# EAGLE board V0p2_Main_PCB2 (EAGLE 7.1.0)
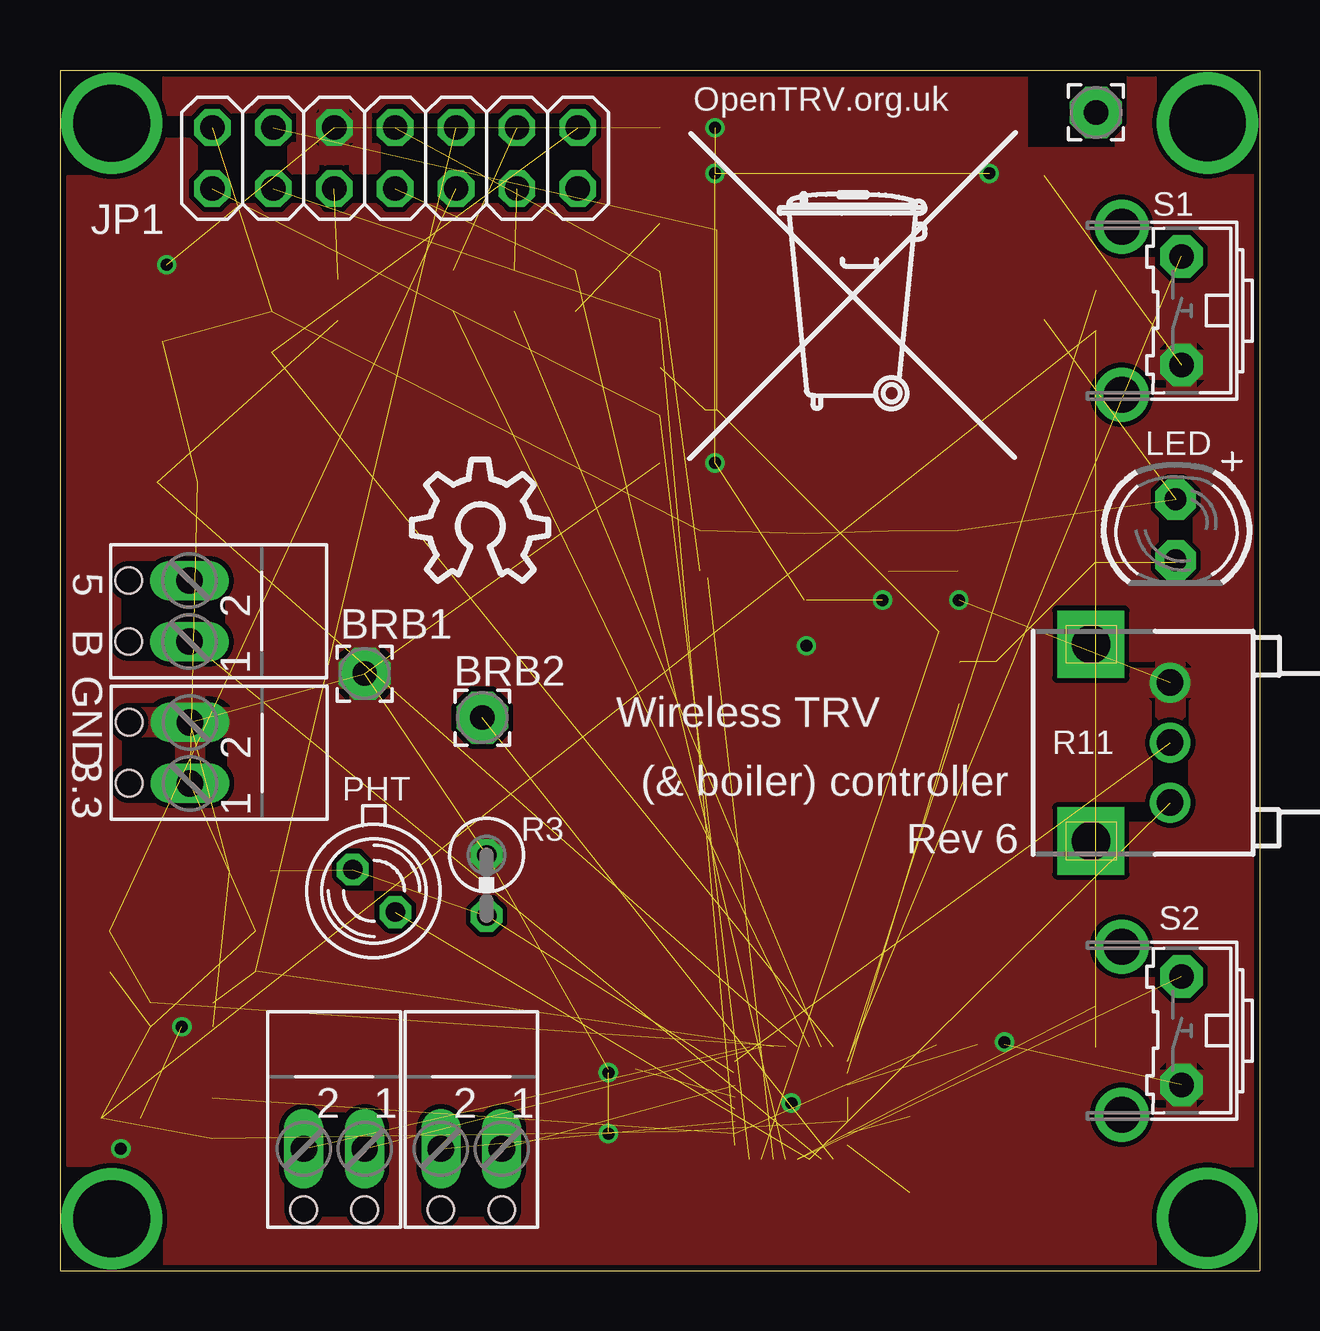
[diagram p0: board, top side]
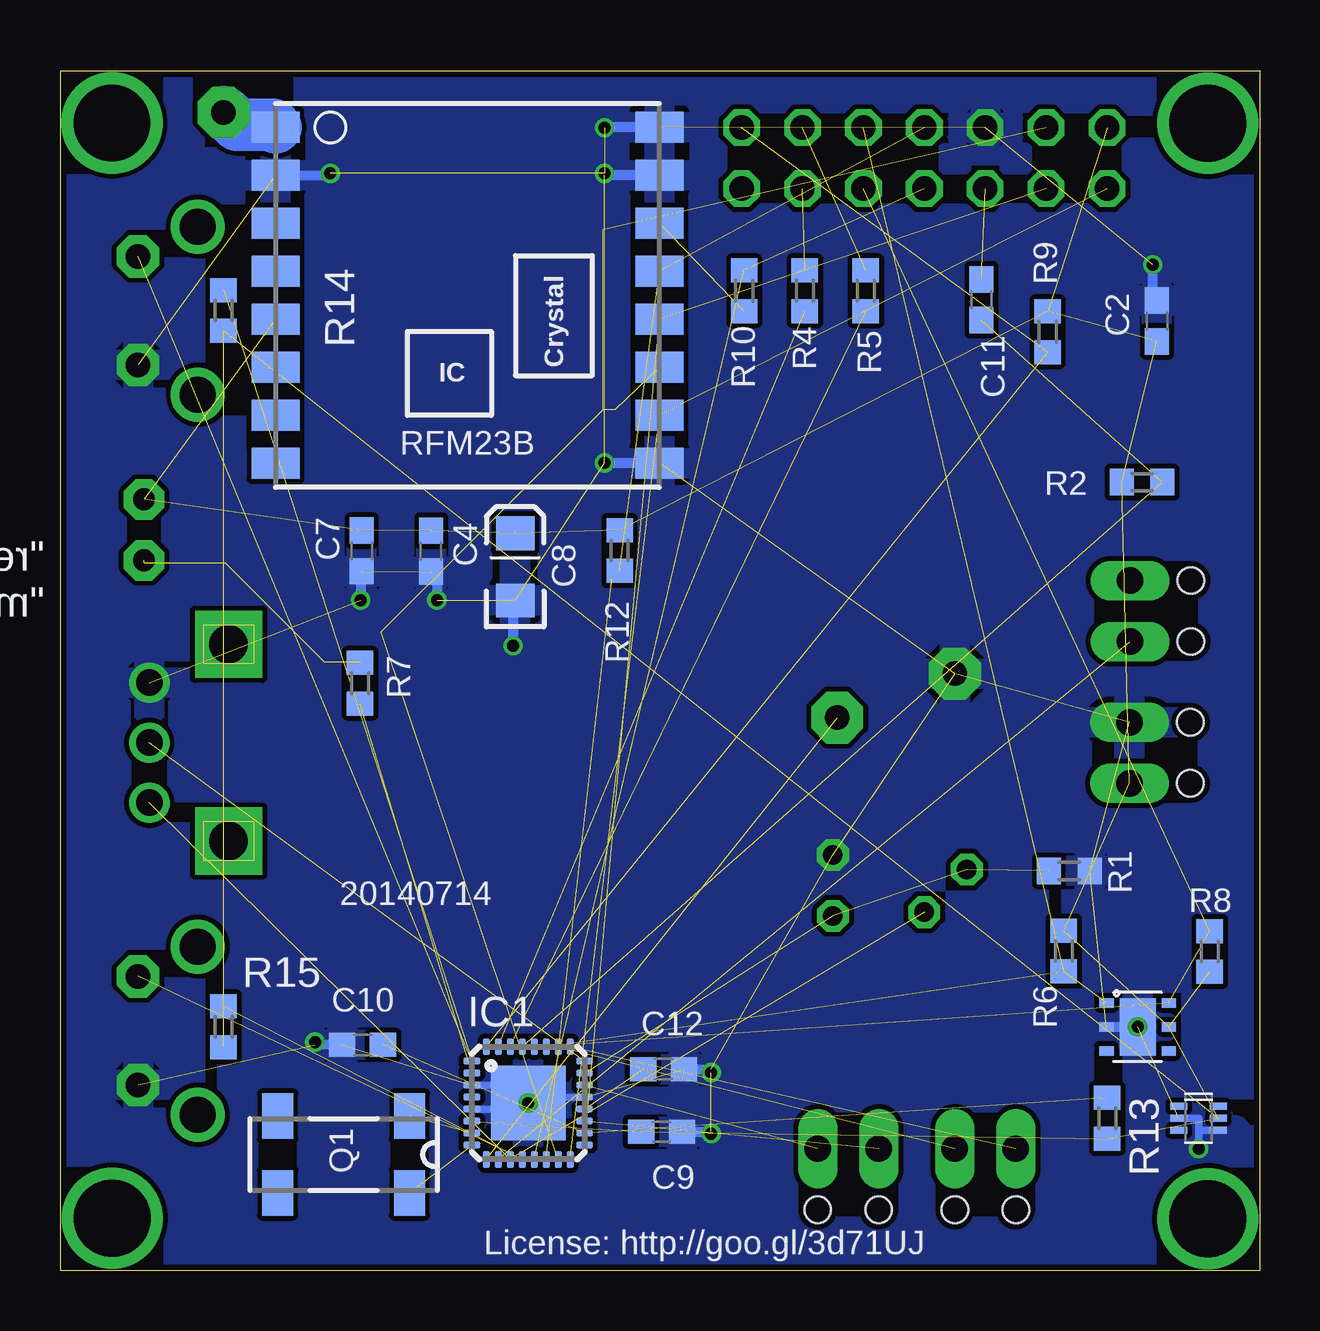
[diagram p1: board, bottom side, seen from below]

Size 50 x 50 mm. Coordinates in mm from the lower left corner, seen from the top.
Outline: 0,0 50,0 50,50 0,50 0,0
Copper layers (1*16): Top 0.035mm / dielectric 1.5mm / Bottom 0.035mm
Design rules "PMServicesStd *": minimum track width 8mil, minimum drill 0.5mm, track to track 8mil, track to pad 8mil, pad to pad 8mil, via to via 8mil, smd to smd 0mil, copper to edge 10mil, drill to drill 10mil, minimum pad ring 10mil, minimum via ring 6mil, stop-mask expansion 2mil, vias tented up to drill 100mil, thermal gap 10mil
Net classes: 0 default: width 0.203 mm; 1 supply: width 0.5 mm; 2 ant: width 2.184 mm

## Footprints (pad centres in the part's own frame; a part is rotated, then mirrored left to right if it is on the bottom)
2,15/1,0 = drill 1.016 pad 2.159 octagon: 1 0,0
C0603 = smd 1.1 x 1: 1 -0.85,0; 2 0.85,0
EIA3216 = smd 1.4 x 1.6: A 1.4,0; C -1.4,0
MLF32 = smd 0.7 x 0.3: 1 -2.35,1.75; 2 -2.35,1.25; 3 -2.35,0.75; 4 -2.35,0.25; 5 -2.35,-0.25; 6 -2.35,-0.75; 7 -2.35,-1.25; 8 -2.35,-1.75; 17 2.35,-1.75; 18 2.35,-1.25; 19 2.35,-0.75; 20 2.35,-0.25; 21 2.35,0.25; 22 2.35,0.75; 23 2.35,1.25; 24 2.35,1.75 | smd 0.3 x 0.7: 9 -1.75,-2.35; 10 -1.25,-2.35; 11 -0.75,-2.35; 12 -0.25,-2.35; 13 0.25,-2.35; 14 0.75,-2.35; 15 1.25,-2.35; 16 1.75,-2.35; 25 1.75,2.35; 26 1.25,2.35; 27 0.75,2.35; 28 0.25,2.35; 29 -0.25,2.35; 30 -0.75,2.35; 31 -1.25,2.35; 32 -1.75,2.35 | smd 3.1 x 3.1: P$1 0,0
2X07 = drill 1.016 octagon: 1 -7.62,-1.27; 2 -7.62,1.27; 3 -5.08,-1.27; 4 -5.08,1.27; 5 -2.54,-1.27; 6 -2.54,1.27; 7 0,-1.27; 8 0,1.27; 9 2.54,-1.27; 10 2.54,1.27; 11 5.08,-1.27; 12 5.08,1.27; 13 7.62,-1.27; 14 7.62,1.27
LED3MM = drill 0.914 pad 1.676 octagon: A -1.27,0; K 1.27,0
BPX65 = drill 0.813 octagon: A -0.889,-0.889; K 0.889,0.889
MC-306 = smd 1.3 x 1.9: 1 -2.75,-1.6; 2 2.75,-1.6; 3 2.75,1.6; 4 -2.75,1.6
R0603 = smd 1 x 1.1: 1 -0.85,0; 2 0.85,0
0309V = drill 0.813 octagon: 1 -1.27,0; 2 1.27,0
EVUE = drill 1.1 pad 1.676: 1 0,-2.5; 2 0,0; 3 0,2.5 | drill 1.6 pad 2.8 square: M1 -3.3,4.1; M2 -3.3,-4.1
RFM23-XXX-S1 = smd 2 x 1.3: 1 -8,7; 2 -8,5; 3 -8,3; 4 -8,1; 5 -8,-1; 6 -8,-3; 7 -8,-5; 8 -8,-7; 9 8,-7; 10 8,-5; 11 8,-3; 12 8,-1; 13 8,1; 14 8,3; 15 8,5; 16 8,7
B3F-31XX = drill 1.016 pad 1.778 octagon: 1 -2.261,-1.245; 2 2.261,-1.245 | drill 1.499 pad 2.032: 3 -3.505,1.245; 4 3.505,1.245
TMP112 = smd 0.285 x 0.7: 1 -0.5,-0.825; 2 0,-0.825; 3 0.5,-0.825; 4 0.5,0.825; 5 0,0.825; 6 -0.5,0.825
SHT21 = smd 0.4 x 0.6: 1 -1,-1.3; 2 0,-1.3; 3 1,-1.3; 4 1,1.3; 5 0,1.3; 6 -1,1.3 | smd 2.4 x 1.5: P$1 0,0
SCREWTERMINAL = drill 1.1 long: 1 -1.27,-1.27; 2 1.27,-1.27 | hole 1.1: -1.27,1.27; 1.27,1.27

## Placement (x,y rotation side)
ANT1  ANT (86 mm)  [2,15/1,0]  43.18,48.26 0 top
BRB1  BRB1  [2,15/1,0]  12.7,24.87 0 top
BRB2  BRB2  [2,15/1,0]  17.6,23.04 180 top
C2  10uF 10V  [C0603]  4.27,39.57 270 bottom
C4  100pF  [C0603]  34.53,29.98 90 bottom
C7  100nF  [C0603]  37.42,29.99 270 bottom
C8  100uF  [EIA3216]  31.03,29.33 90 bottom
C9  100nF  [C0603]  24.92,5.78 0 bottom
C10  100nF  [C0603]  37.39,9.41 180 bottom
C11  100nF  [C0603]  11.59,40.45 90 bottom
C12  100nF  [C0603]  24.84,8.39 0 bottom
IC1  ATMEGA???-MU  [MLF32]  30.48,6.99 0 bottom
JP1  [2X07]  13.97,46.35 0 top
LED  [LED3MM]  46.5,30.86 270 top
PHT  BPX65  [BPX65]  13.09,15.82 270 top
Q1  32768Hz  [MC-306]  38.18,4.84 180 bottom
R1  220K  [R0603]  7.93,16.65 0 bottom
R2  10K  [R0603]  4.89,32.86 0 bottom
R3  [0309V]  17.78,16.05 270 top
R4  4.7K  [R0603]  18.95,40.83 90 bottom
R5  4.7K  [R0603]  16.41,40.83 90 bottom
R6  4K7  [R0603]  8.16,13.32 270 bottom
R7  470R  [R0603]  37.5,24.47 90 bottom
R8  4K7  [R0603]  2.08,13.3 270 bottom
R9  4.7K  [R0603]  8.83,39.12 90 bottom
R10  4.7K  [R0603]  21.48,40.83 270 bottom
R11  EVUE2A  [EVUE]  46.27,22 0 top
R12  47K  [R0603]  26.67,30 90 bottom
R13  1R  [R0603]  6.35,6.35 270 bottom
R14  4K7  [R0603]  43.18,40.01 270 bottom
R15  4K7  [R0603]  43.18,10.16 270 bottom
RFM23B  RFM23B  [RFM23-XXX-S1]  33.02,40.64 0 bottom
S1  [B3F-31XX]  45.5,40 90 top
S2  [B3F-31XX]  45.5,10 90 top
TMP1  TMP1  [TMP112]  2.54,6.35 270 bottom
U$1  [OSHW_10X200_NOTEXT]  14.67,28.73 0 top
U$2  [TONNE]  32.88,37.88 0 top
U$4  SHT21  [SHT21]  5.08,10.16 270 bottom
X1  [SCREWTERMINAL]  4.13,27.48 90 top
X2  [SCREWTERMINAL]  4.15,21.57 90 top
X3  [SCREWTERMINAL]  11.43,3.81 180 top
X4  [SCREWTERMINAL]  17.14,3.81 180 top

## Library data of the parts
ANT1 BRB1 BRB2 = wirepad
C2 C4 C7 C9-C12 R1-R10 R12-R15 = resistor
C8 = SparkFun-Passives
IC1 = Arduino-AVR
JP1 = pinhead
LED S1 S2 = adafruit
PHT = opto-trans-siemens; MPN: BPX65.; OC_FARNELL: 327451; OC_NEWARK: 06WX2764
Q1 = crystal; MPN: MC-306 60.0KHZ 100PPM ,12.5PF; OC_FARNELL: 1278040; OC_NEWARK: 31M5576
R11 = pot
RFM23B = SparkFun-RF
TMP1 = TMP112
U$1 = ohw-logo
U$2 = logo
U$4 = SHT21
X1-X4 = screwterminal; MPN: 237-102; OC_FARNELL: unknown; OC_NEWARK: 70K9898

## Nets
BOILER: IC1.10 X1.1
BUTTON_LEARN2_L: IC1.1 R14.1 S1.2
BUTTON_LEARN_L: IC1.12 R15.1 S2.2
BUTTON_MODE_L: BRB2.1 IC1.9
DQ: IC1.32 JP1.14 R9.1
GND [supply]: BRB1.1 C2.1 C4.1 C7.2 C8.C C9.2 C10.2 C12.2 IC1.3 IC1.5 IC1.21 IC1.P$1 JP1.6 R1.2 R3.1 R11.3 RFM23B.2 RFM23B.9 RFM23B.15 RFM23B.16 S1.1 S2.1 TMP1.2 TMP1.4 U$4.2 U$4.P$1 X2.2
IO_POWER_UP [supply]: IC1.11 PHT.K R11.1
LDR: IC1.23 PHT.A R1.1 R3.2
LED_HEATCALL_L: IC1.2 R7.1
MC: IC1.22 X4.1
MI: IC1.19 X4.2
ML: IC1.25 X3.2
MR: IC1.26 X3.1
N$1: C11.2 JP1.5
N$3: JP1.12 R5.2
N$5: JP1.11 R4.2
N$6 [supply]: C12.1 IC1.20
N$7: R10.2 RFM23B.14
N$8: C10.1 IC1.18 R13.1
N$13: LED.K R7.2
N$31 [ant]: ANT1.1 RFM23B.1
POT: IC1.24 R11.2
RESET: C11.1 IC1.29 R2.2
RFM_IRQ: IC1.13 JP1.7 R10.1
RXD0: IC1.31 R4.1
SCL: IC1.28 JP1.9 R8.1 U$4.6
SDA: IC1.27 JP1.10 R6.2 U$4.1
SPI_MISO: IC1.16 JP1.1 RFM23B.10
SPI_MOSI: IC1.15 JP1.4 RFM23B.11
SPI_NSS: IC1.14 JP1.8 R12.1 RFM23B.13
SPI_SCK: IC1.17 JP1.3 RFM23B.12
TXD0: IC1.30 R5.1
VCC [supply]: C2.2 C4.2 C7.1 C8.A C9.1 IC1.4 IC1.6 JP1.2 LED.A R2.1 R6.1 R8.2 R9.2 R12.2 R13.2 R14.2 R15.2 RFM23B.5 TMP1.5 U$4.5 X2.1
XTAL1: IC1.7 Q1.1
XTAL2: IC1.8 Q1.4

## Tracks (layer width: path | path; a pad name or v marks a point on that pad's centre or on a via)
BOILER  (1 unrouted)
BUTTON_LEARN2_L  (2 unrouted)
BUTTON_LEARN_L  (2 unrouted)
BUTTON_MODE_L  (1 unrouted)
DQ  (2 unrouted)
GND  (via drill 0.5)  (21 unrouted)
  Bottom 0.305: IC1.5 30.48,6.74 | IC1.3 30.48,7.74 | IC1.21 30.48,7.24 | TMP1.2 2.54,6.35 2.54,5.85 | 2.54,5.85 v2.54,5.08 | TMP1.4 2.54,5.85
  Bottom 0.406: U$4.2 U$4.P$1 | 30.48,6.74 IC1.P$1 | 30.48,7.74 IC1.P$1 | 30.48,7.24 IC1.P$1 | C8.C 31.11,27.93 v31.11,26.04 | C4.1 34.29,29.13 v34.29,27.94 | C7.2 37.47,29.14 v37.47,27.94 | C2.1 4.45,40.42 v4.45,41.91 | v27.3,33.66 25.02,33.66 RFM23B.9 | RFM23B.2 38.73,45.64 v38.73,45.72 | RFM23B.15 27.3,45.64 v27.3,45.72 | RFM23B.16 27.3,47.64 v27.3,47.62 | C10.2 39.37,9.41 v39.37,9.53 | C12.2 22.86,8.39 v22.86,8.26 | C9.2 22.86,5.78 v22.86,5.71
  other vias: 5.08,10.16 30.48,6.99
  pour Bottom: 0,0 50,0 50,50 44.6,50 44.6,46.19 39.72,46.18 39.72,50 0,50
  pour Top: 0,50 0,0 50,0 50,50 44.6,50 44.6,46.19 39.72,46.18 39.72,50
IO_POWER_UP  (2 unrouted)
LDR  (3 unrouted)
  Bottom 0.203: 28.1,8.24 IC1.23
LED_HEATCALL_L  (1 unrouted)
MC  (1 unrouted)
MI  (1 unrouted)
ML  (1 unrouted)
MR  (1 unrouted)
N$1  (1 unrouted)
N$3  (1 unrouted)
N$4  (via drill 3.2)
  other vias: 2.16,47.81
N$5  (1 unrouted)
N$6  (1 unrouted)
N$7  (1 unrouted)
N$8  (2 unrouted)
N$12  (via drill 3.2)
  other vias: 47.83,2.19
N$13  (5 unrouted)
N$19  (via drill 3.2)
  other vias: 47.83,47.82
N$22  (via drill 3.2)
  other vias: 2.16,2.16
N$31
  Bottom 2.184: RFM23B.1 41.12,47.75 42.62,47.75 43.12,48.25 ANT1.1
POT  (1 unrouted)
RESET  (2 unrouted)
RFM_IRQ  (2 unrouted)
RXD0  (1 unrouted)
SCL  (3 unrouted)
SDA  (3 unrouted)
SPI_MISO  (2 unrouted)
SPI_MOSI  (7 unrouted)
SPI_NSS  (3 unrouted)
  Bottom 0.203: 27,28.88 26.75,29.12 R12.1
SPI_SCK  (2 unrouted)
TXD0  (1 unrouted)
VCC  (20 unrouted)
  Bottom 0.5: 40.62,39.62 41,39.62 RFM23B.5
XTAL1  (1 unrouted)
XTAL2  (1 unrouted)

## Text on the board
bPlace: License: http://goo.gl/3d71UJ
tNames: OpenTRV.org.uk | 5 | B | GND | Wireless TRV | 3.3 | (& boiler) controller | Rev 6
bNames: "replace milling with slot drilling if rqd" / "min 2.1mm x 1.8mm" | 20140714